# Altium PCB Center Console.PcbDoc
Units mm, origin at the board's own origin, x right, y up, seen from the top; angles counter-clockwise.
Board outline 60 x 60 mm, 2 copper layers (Top Layer, Bottom Layer); 16 components, 26 nets, 102 pads, 32 vias.
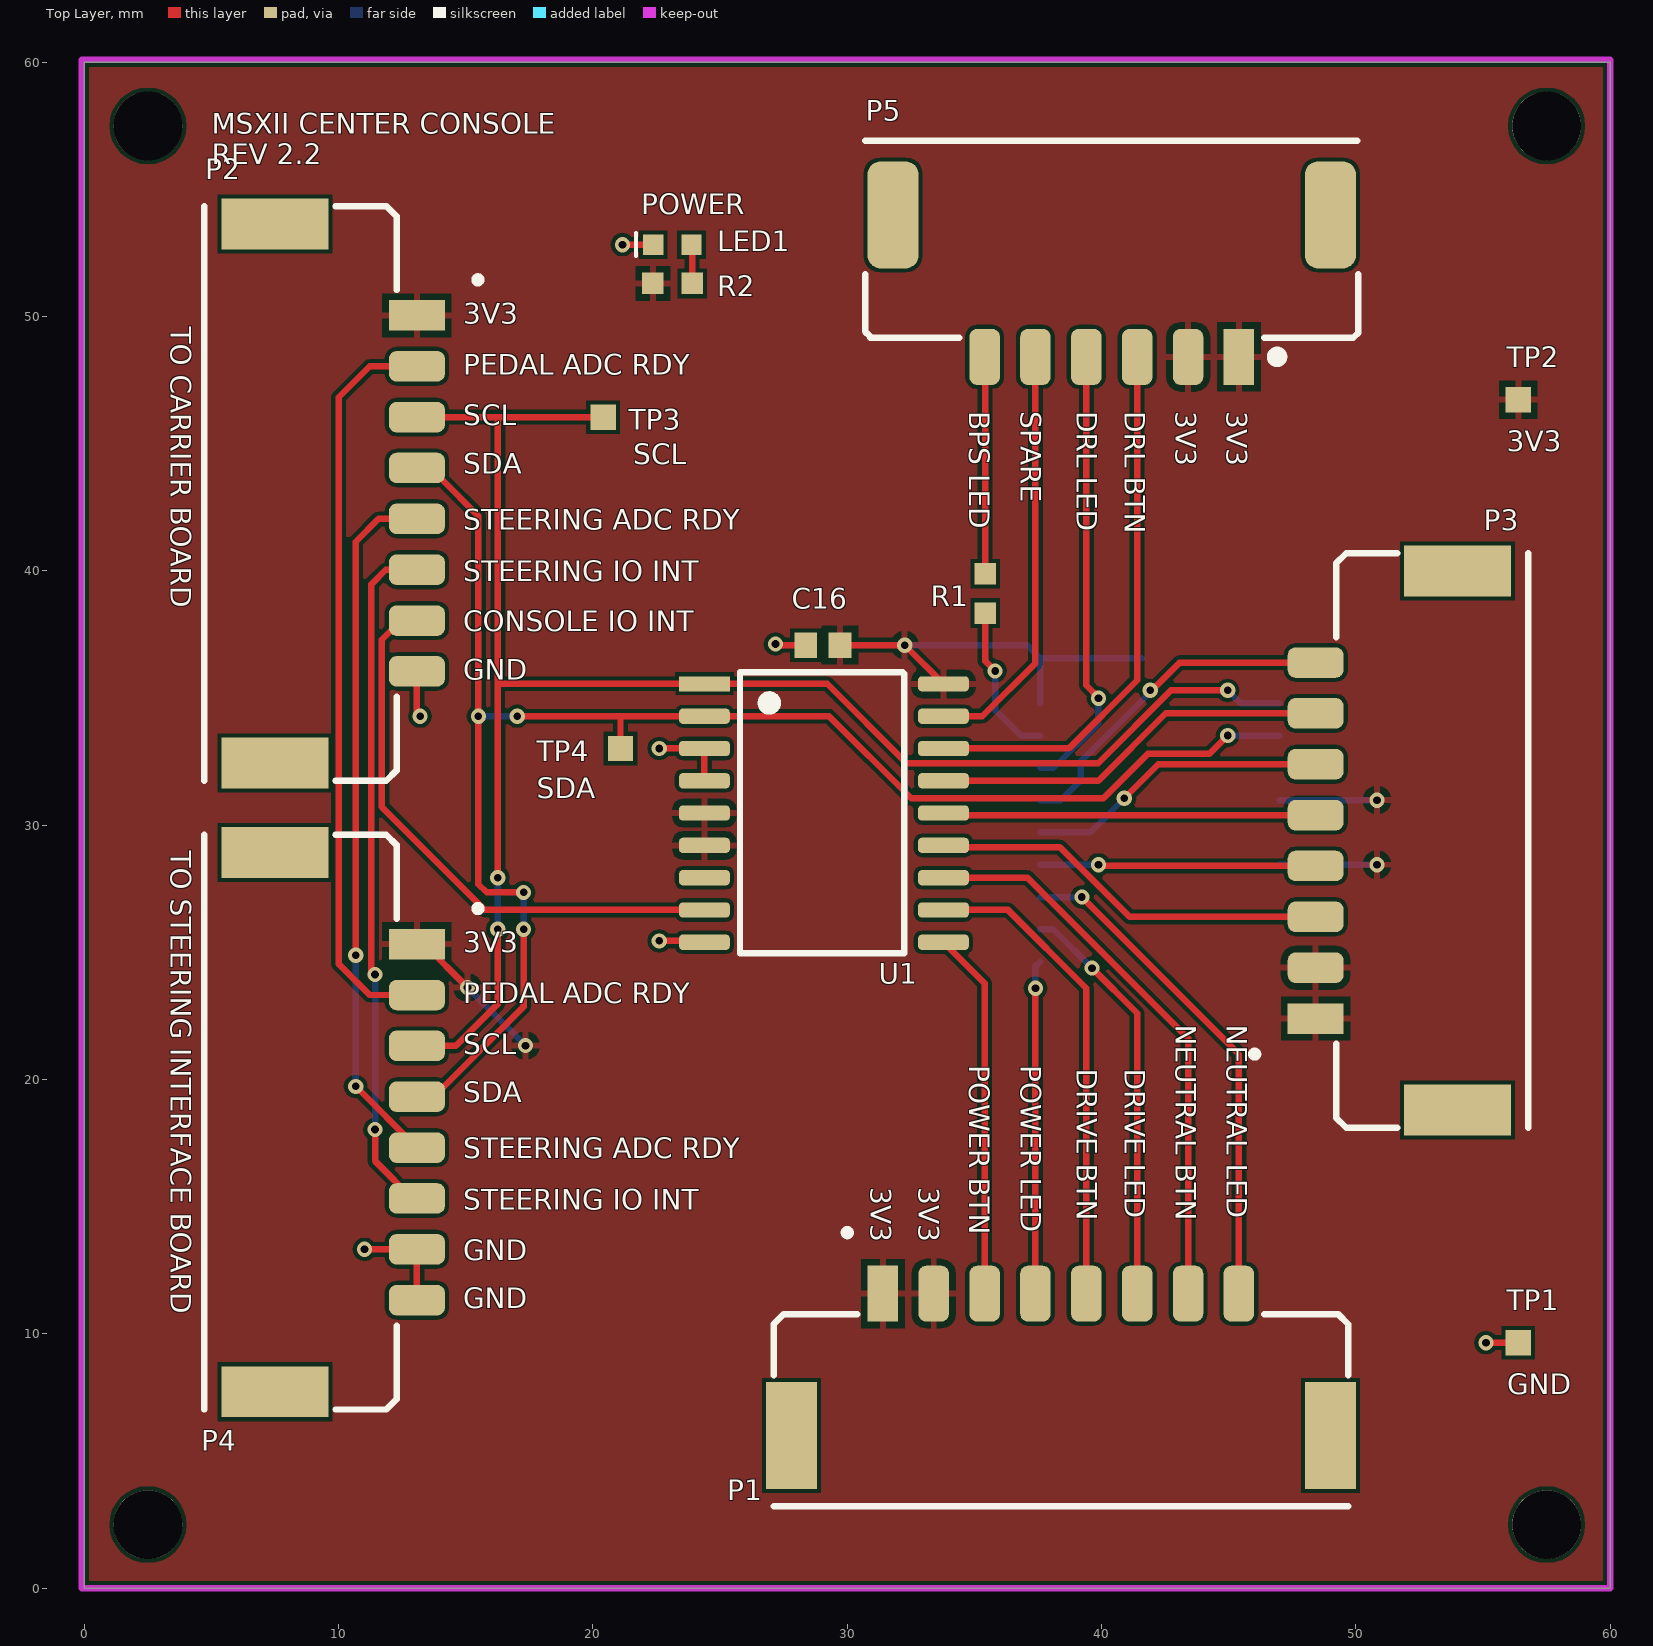
[diagram p0: Top Layer view]
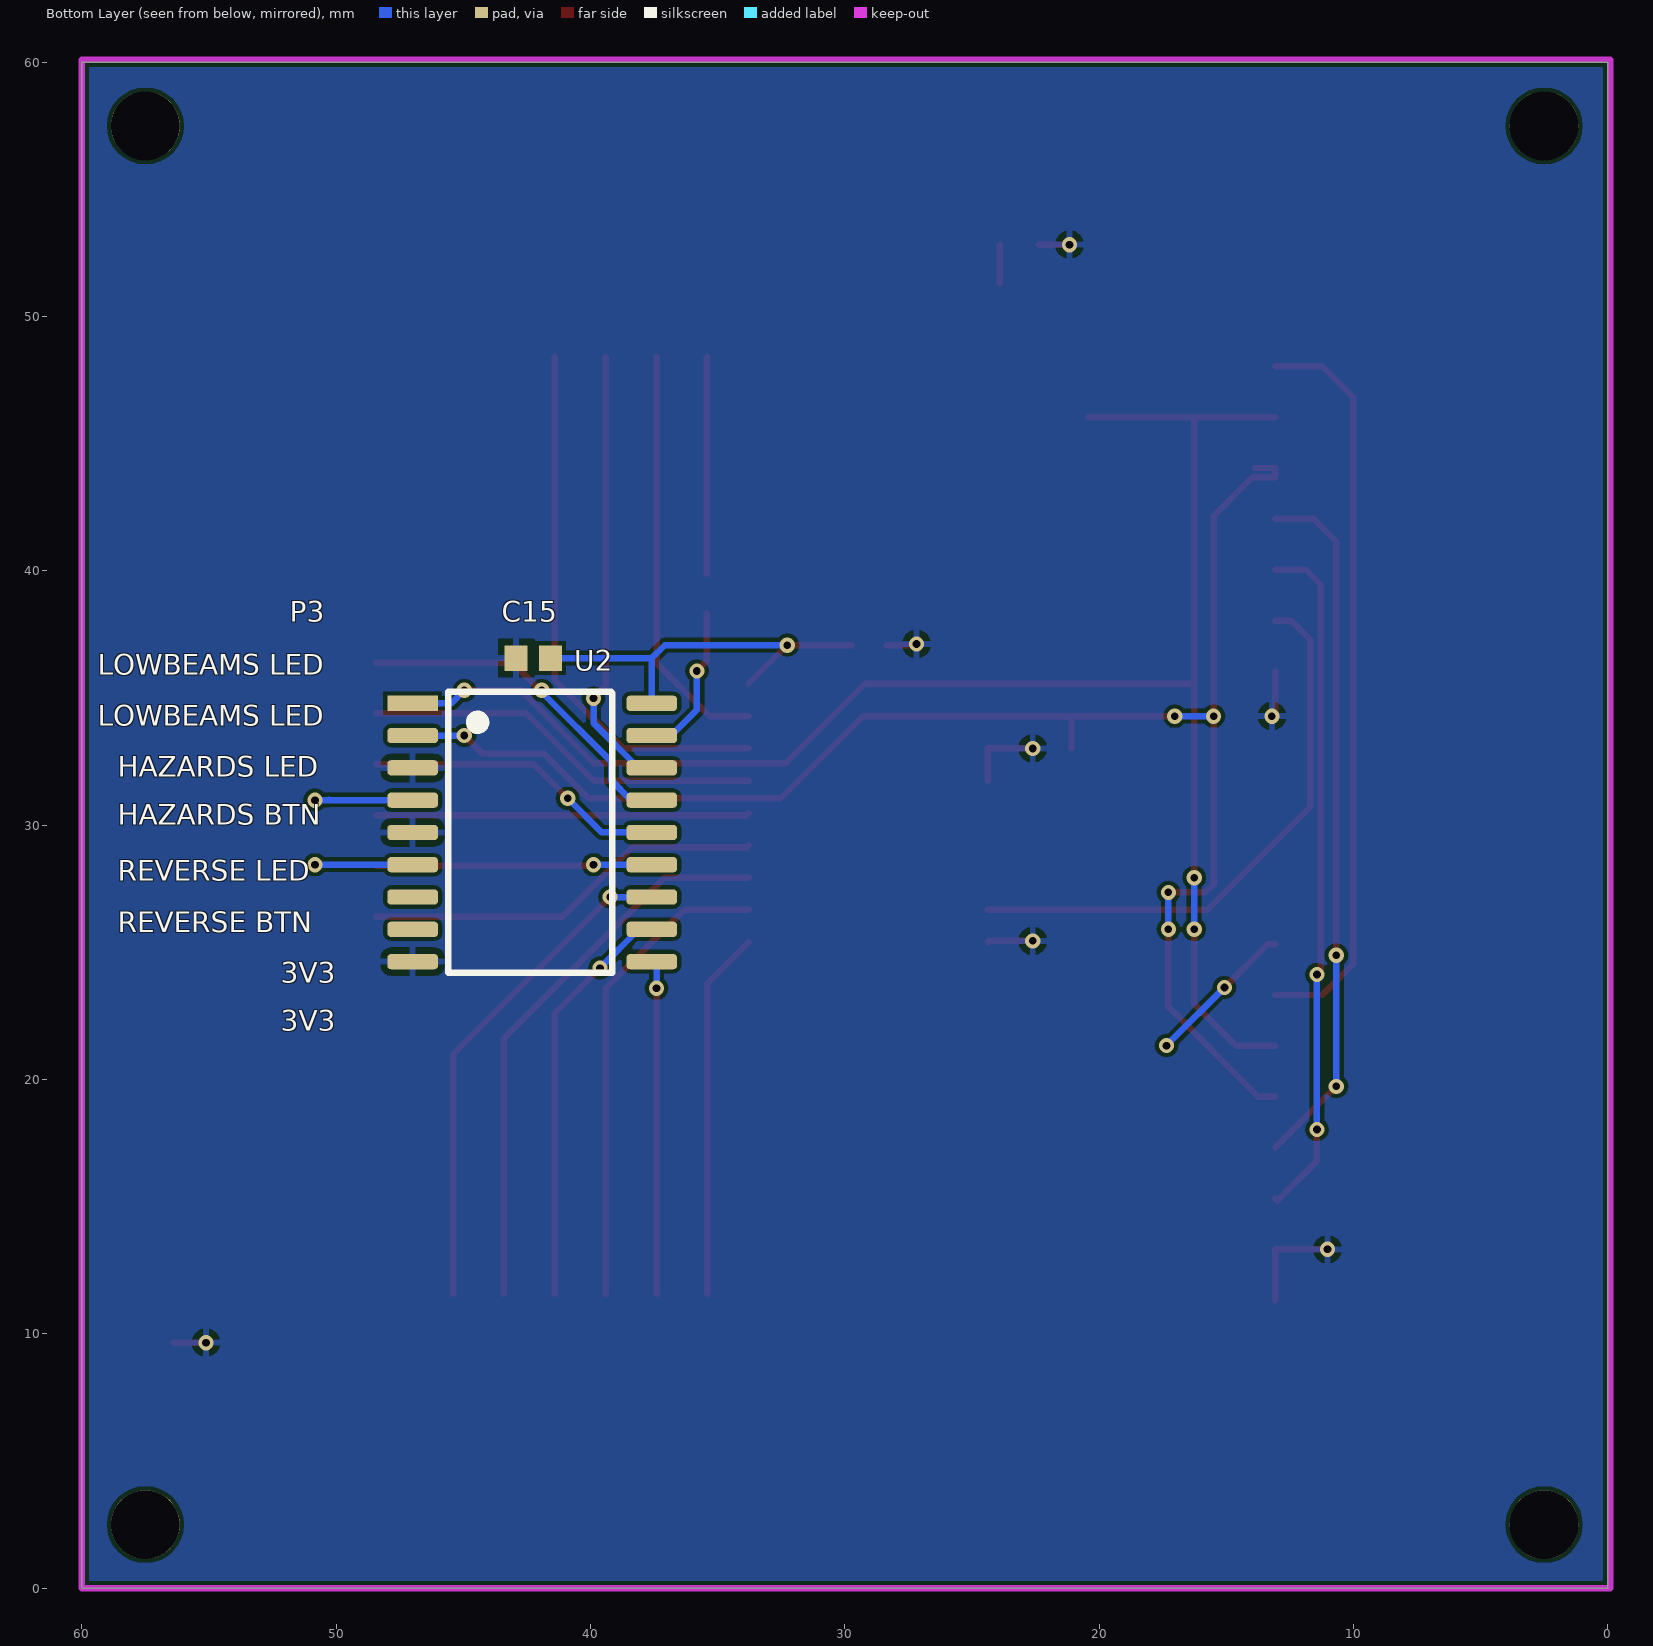
[diagram p1: Bottom Layer view, seen from below]
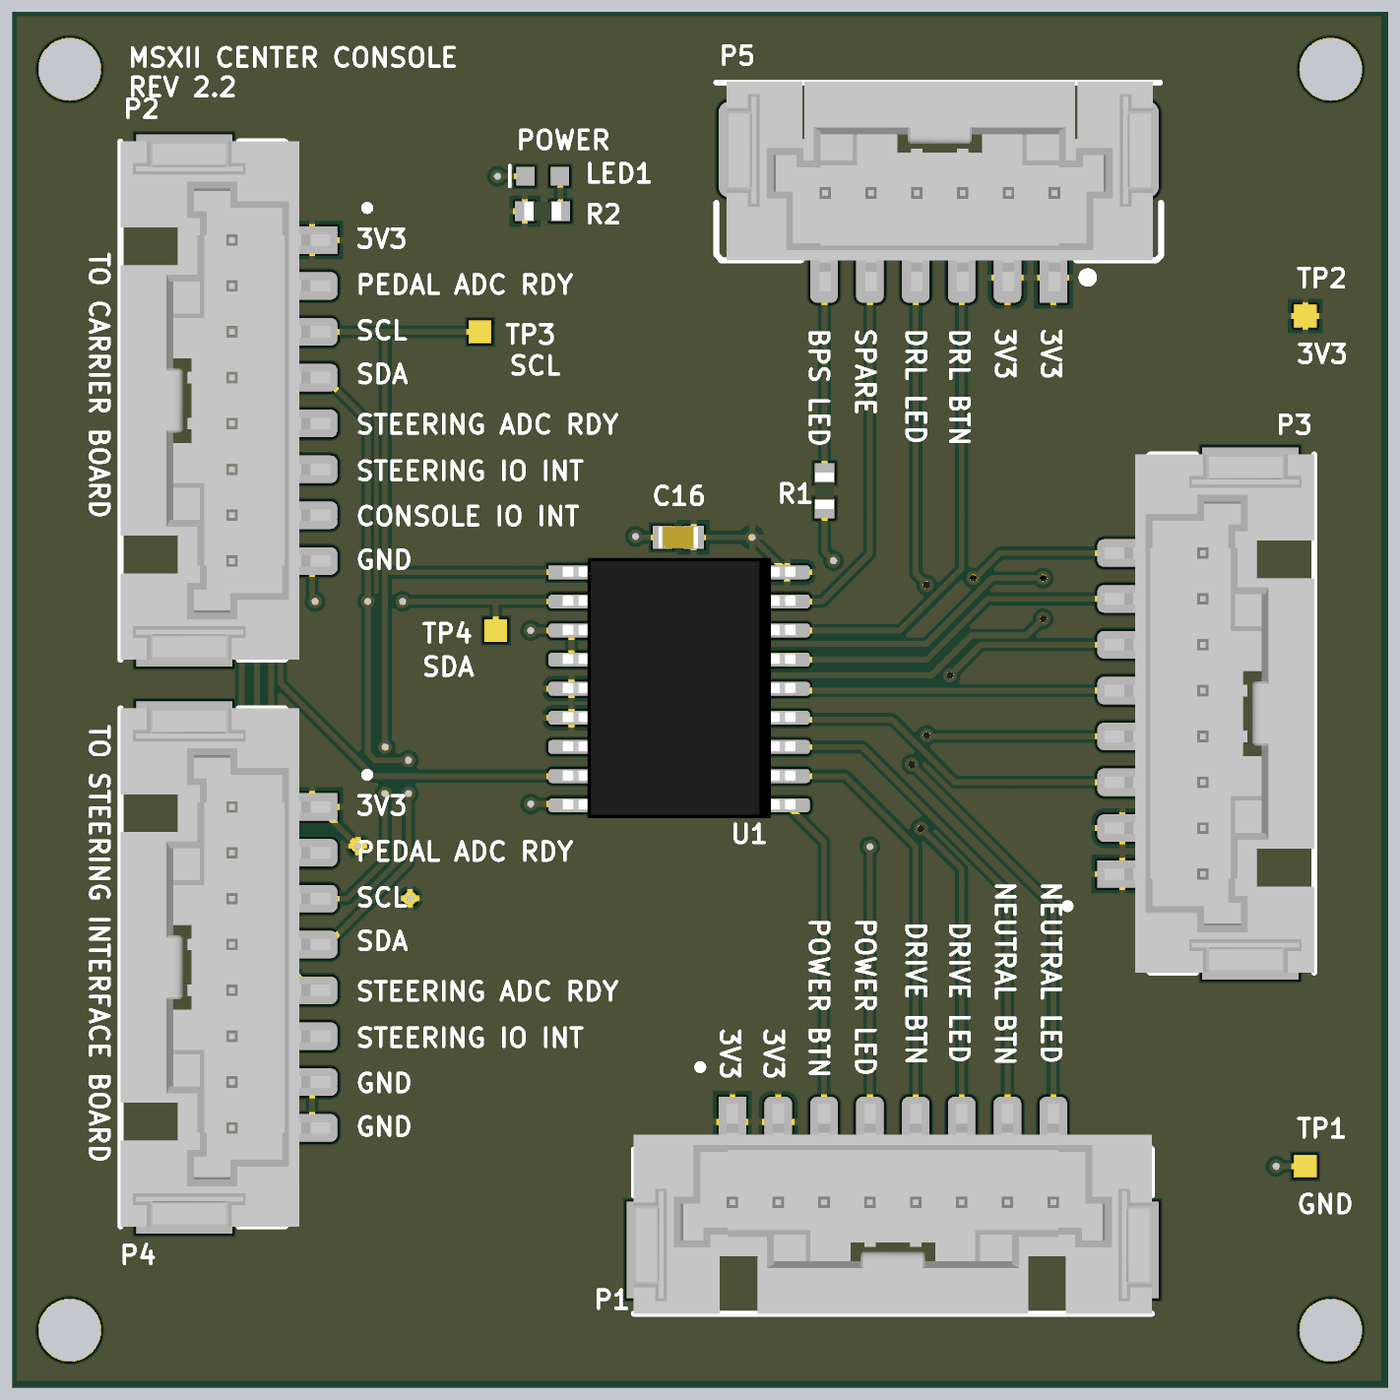
[diagram p2: 3D render of the assembled board from above, using the file's embedded part models]

## Layer stack, top to bottom
Top Solder: solder mask 0.0102, Solder Resist, Dk 3.5
Top Layer: signal copper 0.0356
Dielectric 1: dielectric 0.32, FR-4, Dk 4.8
Bottom Layer: signal copper 0.0356
Bottom Solder: solder mask 0.0102, Solder Resist, Dk 3.5

## Board outline
0,0 60,0 60,60 0,60

## Design rules (kind name [scope] priority, off if disabled: settings)
Clearance [All] p1: gap=0.152 ignorepadtopadclearanceinfootprint=TRUE
PolygonConnect [All] p1: connectstyle=Relief reliefconductorwidth=0.254 reliefentries=4 polygonreliefangle="90 Angle" airgapwidth=0.254
RoutingVias [All] p1: holewidth=0.3 width=0.6 viastyle="Through Hole" minholewidth=0.3 minwidth=0.6 maxholewidth=1 maxwidth=2
SolderMaskExpansion [All] p1: expansion=0.102
Width [All] p1: maxlimit=0.635 minlimit=0.254 preferedwidth=0.254
30 further rules are at their usual default settings.

## Components (designator, comment, footprint, x,y, rotation, side; value= is the part's Value field where it differs from the comment)
C15 "CAP CER 0.1UF 50V 10% X7R 0603" "CAP, 0603" 42.251,36.576 r0 bottom
C16 "CAP CER 0.1UF 50V 10% X7R 0603" "CAP, 0603" 29.043,37.084 r180 top
LED1 "LED GREEN CLEAR 2V 0603" LED_0603 23.826,52.842 r180 top
P1 "CONN 8POS DURA-CLIK 0.079\"" "CONN, 8POS Dura-Clik" 31.4,11.58 r0 top
P2 "CONN 8POS DURA-CLIK 0.079\"" "CONN, 8POS Dura-Clik" 13.075,50.05 r270 top
P3 "CONN 8POS DURA-CLIK 0.079\"" "CONN, 8POS Dura-Clik" 48.42,22.4 r90 top
P4 "CONN 8POS DURA-CLIK 0.079\"" "CONN, 8POS Dura-Clik" 13.075,25.325 r270 top
P5 "DURA-CLIK" "CONN, 6POS DURA-CLIK VERT" 45.4,48.42 r180 top
R1 "RES 510 OHM 5% 1/10W 0603" "RES, 0603" 35.423,39.116 r270 top
R2 "RES 10K OHM 1% 1/10W 0603" "RES, 0603" 23.127,51.308 r0 top
TP1 "Test Point" "Test Point" 56.388,9.652 r90 top
TP2 "Test Point" "Test Point" 56.388,46.736 r90 top
TP3 "Test Point" "Test Point" 20.396,46.05 r90 top
TP4 "Test Point" "Test Point" 21.082,33.02 r90 top
U1 "MCP23008" "IC 18SOIC" 24.382,35.56 r270 top locked
U2 "MCP23008" "IC 18SOIC" 46.99,34.798 r270 bottom locked

## Footprints (in the part's own frame and the unit in brackets; to place one, negate y for a bottom-side part, rotate by r counter-clockwise, add the part's x,y. Pads: shape width x height; smd on the part's side, far side on the other; paste and mask are expansions set on the pad)
"CAP, 0603" [mm] "Chip Capacitor, 2-Leads, Body 1.60x0.81mm, IPC Medium Density"
  rect 0.9x1 smd mask+0.076: 1(-0.675,0) 2(0.675,0)
  body extent -0.87,-0.48 0.88,0.48, height 0.9
"CONN, 6POS DURA-CLIK VERT" [mm]
  rect 1.2x2.2 smd: 1(0,0)
  rrect50% 1.2x2.2 smd: 2(2,0) 3(4,0) 4(6,0) 5(8,0) 6(10,0)
  rrect50% 2x4.2 smd: 7(-3.6,-5.58) 7(13.6,-5.58)
  silkscreen extent -4.7,-8.5 14.7,0.15, body extent -4.35,-8.54 14.25,0.61, height 7.97
"CONN, 8POS Dura-Clik" [mm] "WM10868CT-ND"
  rect 1.2x2.2 smd: 1(0,0)
  rrect50% 1.2x2.2 smd: 2(2,0) 3(4,0) 4(6,0) 5(8,0) 6(10,0) 7(12,0) 8(14,0)
  rect 2x4.2 smd: ""(-3.6,-5.58) ""(17.6,-5.58)
  silkscreen extent -4.3,-8.36 18.3,2.53, body extent -4.3,-8.36 18.3,0.79, height 8.02
"IC 18SOIC" [mm]
  rect 0.6x2 smd: 1(0,0)
  rrect50% 0.6x2 smd: 2(1.27,0) 3(2.54,0) 4(3.81,0) 5(5.08,0) 6(6.35,0) 7(7.62,0) 8(8.89,0) 9(10.16,0) 10(10.16,9.4) 11(8.89,9.4) 12(7.62,9.4) 13(6.35,9.4) 14(5.08,9.4) 15(3.81,9.4) 16(2.54,9.4) 17(1.27,9.4) 18(0,9.4)
  silkscreen extent -0.45,1.4 10.6,7.85, body extent -0.63,-0.38 10.73,9.78, height 2
LED_0603 [mm]
  rect 0.8x0.8 smd: 1(-0.05,0.01) 2(1.45,0.01)
  silkscreen extent 2.13,-0.46 2.13,0.45, body extent -0.09,-0.39 1.51,0.41, height 0.8
"RES, 0603" [mm] "Chip Resistor, 2-Leads, Body 1.60x0.80mm, IPC Medium Density"
  rect 0.85x0.85 smd: 1(-0.775,0) 2(0.775,0)
  body extent -0.8,-0.4 0.8,0.4, height 0.55
"Test Point" [mm]
  rect 1x1 smd paste-2: TP(0,0)

## Part data
C15 C16: "0.10µF ±10% 50V Ceramic Capacitor X7R 0603 (1608 Metric)", Capacitance=0.1µF, Manufacturer 1="AVX Corporation", Manufacturer Part Number 1=06035C104KAT2A, Operating Temperature="-55°C ~ 125°C", Package / Case="0603 (1608 Metric)", Ratings=-, Supplier Part Number 1=478-5052-1-ND, Temperature Coefficient=X7R, Tolerance=±10%, Voltage=50V, ComponentLink1Description=http://datasheets.avx.com/X7RDielectric.pdf, ComponentLink1URL=http://datasheets.avx.com/X7RDielectric.pdf, Height - Seated (Max)=-, Lead Spacing=-, Lead Style=-, Mounting Type="Surface Mount, MLCC", Packaging="Cut Tape (CT)", Part Status=Active, Size / Dimension="0.063\" L x 0.032\" W (1.60mm x 0.81mm)", Supplier 1=Digi-Key, Thickness (Max)="0.035\" (0.90mm)"
LED1: "Green 572nm LED Indication - Discrete 2V 0603 (1608 Metric)", Color=Green, Current - Test=20mA, Lens Color=Colorless, Manufacturer="Wurth Electronics Inc.", Manufacturer Part Number=150060VS75000, Millicandela Rating=40mcd, Package / Case="0603 (1608 Metric)", Supplier Device Package=0603, Supplier Part Number 1=732-4980-1-ND, Voltage - Forward (Vf) (Typ)=2V, Category=Optoelectronics, ComponentLink1Description=http://katalog.we-online.de/led/datasheet/150060VS75000.pdf, ComponentLink1URL=http://katalog.we-online.de/led/datasheet/150060VS75000.pdf, Features=-, Height (Max)=0.80mm, Lens Style/Size="Rectangle with Flat Top, 1.10mm x 0.70mm", Lens Transparency=Clear, Mounting Type="Surface Mount", Packaging="Cut Tape (CT)", Part Status=Active, Pricing 1="1=0.21, 100=0.1617, 500=0.13964 (CAD)", RoHS="RoHS Compliant", Size / Dimension="1.60mm L x 0.80mm W", Stock 1=9408, Supplier 1=Digi-Key, Viewing Angle=140°, Wavelength - Dominant=570nm, Wavelength - Peak=572nm
P1 P2 P3 P4: "8 Positions Header Connector 0.079\" (2.00mm) Surface Mount Tin", Current Rating=-, Insulation Color=Natural, Manufacturer 1="Molex, LLC", Manufacturer Part Number 1=5600200820, Supplier Part Number 1=WM10868CT-ND, ComponentLink1Description=http://www.molex.com/pdm_docs/sd/5600200820_sd.pdf, ComponentLink1URL=http://www.molex.com/pdm_docs/sd/5600200820_sd.pdf, Connector Type=Header, Contact Finish - Mating=Tin, Contact Finish - Post=Tin, Contact Finish Thickness - Mating=-, Contact Finish Thickness - Post=-, Contact Length - Mating=-, Contact Length - Post=-, Contact Material="Copper Alloy", Contact Shape=Square, Contact Type="Male Pin", Fastening Type="Latch Lock", Ingress Protection=-, Insulation Height="0.315\" (8.00mm)", Insulation Material="Polyamide (PA), Nylon", Mated Stacking Heights=9.3mm, Material Flammability Rating=-, Mounting Type="Surface Mount", Number of Positions=8, Number of Positions Loaded=All, Number of Rows=1, Operating Temperature=-, Overall Contact Length=-, Packaging="Cut Tape (CT)", Part Status=Active, Pitch - Mating="0.079\" (2.00mm)", Row Spacing - Mating=-, Series=DuraClik, Shrouding="Shrouded - 4 Wall", Style="Board to Cable/Wire", Supplier 1=Digi-Key, Termination=Solder, Voltage=-
P5: library part "CONN 6POS DURA-CLIK 0.079\"", "6 Positions Header, Shrouded Connector 0.079\" (2.00mm) Surface Mount, Vertical Tin", Current Rating=-, Insulation Color=Natural, Manufacturer=Molex, Manufacturer Part Number=5600200820, Supplier Part Number 1=WM10866CT-ND, Applications="Automotive, Industrial", Category="Connectors, Interconnects", ComponentLink1Description=http://www.molex.com/pdm_docs/sd/5600200220_sd.pdf, ComponentLink1URL=http://www.molex.com/pdm_docs/sd/5600200220_sd.pdf, Connector Type=Header, Contact Finish - Mating=Tin, Contact Finish - Post=Tin, Contact Finish Thickness - Mating=-, Contact Finish Thickness - Post=-, Contact Length - Mating=-, Contact Length - Post=-, Contact Material="Copper Alloy", Contact Shape=Square, Contact Type="Male Pin", Fastening Type="Latch Lock", Features="Solder Retention", Ingress Protection=-, Insulation Height="0.315\" (8.00mm)", Insulation Material="Polyamide (PA), Nylon", Mated Stacking Heights=9.3mm, Material Flammability Rating=-, Mounting Type="Surface Mount", Number of Positions=6, Number of Positions Loaded=All, Number of Rows=1, Operating Temperature=-, Overall Contact Length=-, Packaging="Cut Tape (CT)", Part Status=Active, Pitch - Mating="0.079\" (2.00mm)", Pricing 1="1=1.76, 10=1.542, 25=1.4512, 50=1.391, 100=1.3305, 250=1.20956 (CAD)", RoHS="RoHS Compliant", Row Spacing - Mating=-, Shrouding="Shrouded - 4 Wall", Stock 1=3826, Style="Board to Cable/Wire", Supplier 1=Digi-Key, Termination=Solder, Voltage Rating=-
R1: "RES SMD 510 OHM 5% 1/10W 0603", Manufacturer 1=Yageo, Manufacturer Part Number 1=RC0603JR-07510RL, Operating Temperature="-55°C ~ 155°C", Package / Case="0603 (1608 Metric)", Power=1/10W, Resistance=510, Supplier Device Package=0603, Supplier Part Number 1=311-510GRCT-ND, Temperature Coefficient=±100ppm/°C, Tolerance=±5%, ComponentLink1Description=http://www.yageo.com/documents/recent/PYu-RC_Group_51_RoHS_L_7.pdf, ComponentLink1URL=http://www.yageo.com/documents/recent/PYu-RC_Group_51_RoHS_L_7.pdf, Composition="Thick Film", Failure Rate=-, Height - Seated (Max)="0.022\" (0.55mm)", Packaging="Cut Tape (CT)", Part Status=Active, Size / Dimension="0.063\" L x 0.031\" W (1.60mm x 0.80mm)", Supplier 1=Digi-Key
R2: "RES SMD 10K OHM 1% 1/10W 0603", Manufacturer 1=Yageo, Manufacturer Part Number 1=RC0603FR-0710KL, Operating Temperature="-55°C ~ 155°C", Package / Case="0603 (1608 Metric)", Power=1/10W, Resistance=10k, Supplier Device Package=0603, Supplier Part Number 1=311-10.0KHRCT-ND, Temperature Coefficient=±100ppm/°C, Tolerance=±1%, ComponentLink1Description=http://www.yageo.com/documents/recent/PYu-RC_Group_51_RoHS_L_7.pdf, ComponentLink1URL=http://www.yageo.com/documents/recent/PYu-RC_Group_51_RoHS_L_7.pdf, Composition="Thick Film", Failure Rate=-, Height - Seated (Max)="0.022\" (0.55mm)", Packaging="Cut Tape (CT)", Part Status=Active, Size / Dimension="0.063\" L x 0.031\" W (1.60mm x 0.80mm)", Supplier 1=Digi-Key
U1 U2: library part "IC I/O EXPANDER I2C 8B 18SOIC", "MCP23008 I/O Expander 8B+1Int 18P SOIC", Current - Output Source/Sink=25mA, Manufacturer="Microchip Technology", Manufacturer Part Number=MCP23008T-E/SO, Operating Temperature="-40°C ~ 125°C", Package / Case="18-SOIC (0.295\", 7.50mm Width)", Supplier Device Package=18-SOIC, Supplier Part Number 1=MCP23008T-E/SOCT-ND, Voltage - Supply="1.8 V ~ 5.5 V", Category="Integrated Circuits (ICs)", ComponentLink1Description=http://www.microchip.com/mymicrochip/filehandler.aspx?ddocname=en021920, ComponentLink1URL=http://www.microchip.com/mymicrochip/filehandler.aspx?ddocname=en021920, Features=POR, Interface=I²C, Interrupt Output=Yes, Mounting Type="Surface Mount", Number of I/O=8, Output Type=Push-Pull, Packaging="Cut Tape (CT)", Part Status=Active, Pricing 1="1=1.62, 25=1.3548, 100=1.2431 (CAD)", RoHS="RoHS Compliant", Stock 1=5607, Supplier 1=Digi-Key

## Free pads (board coordinates)
  round 2.7 hole 2.7: ""(2.5,2.5) ""(2.5,57.5) ""(57.5,2.5) ""(57.5,57.5)

## Via types
v1: diameter 0.6, hole 0.3, Top Layer to Bottom Layer, tented both sides, 30 vias
v2: diameter 0.6, hole 0.3, Top Layer to Bottom Layer, 2 vias

## Nets (pads, with @x,y where several pads share a name; then routed paths per layer and width w, separated by ;. In a path a pad name is that pad's centre, name@x,y a point inside that pad or via, vN(x,y) a via of type N, cw(c..) or ccw(c..) an arc to the next point about the centre after c; other vN are vias at no path point)
3V3: C15.1 C16.1 P1.1 P1.2 P2.1 P3.1 P3.2 P4.1 P5.1 P5.2 R2.1 TP2.TP U1.5 U1.6 U1.18 U2.4 U2.6 U2.18 | length 29.7
  Top Layer w0.254: P4.1 13.365,25.325 v2(15.068,23.622) ; C16.1 v1(32.258,37.084) U1.18
  Bottom Layer w0.254: v2(15.068,23.622) 17.195,21.495 17.195,21.336 v2(17.344,21.336) ; v1(32.258,37.084) 37.082,37.084 37.59,36.576 ; U2.18 37.59,36.576 ; C15.1 37.59,36.576 ; U2.6 v1(50.832,28.448) ; U2.4 50.269,30.988 50.292,31.011 50.315,30.988 v1(50.832,30.988)
CONSOLE_IO_INTERRUPT: P2.7 U1.8 | length 22.6
  Top Layer w0.254: P2.7 12.446,38.05 11.696,37.3 11.696,30.722 15.748,26.67 U1.8
GND: C15.2 C16.2 LED1.2 P2.8 P4.7 P4.8 TP1.TP U1.3 U1.4 U1.9 U2.3 U2.5 U2.9 | length 14.4
  Top Layer w0.254: v1(11.018,13.325) P4.7 P4.8 ; P2.8 13.075,34.417 v1(13.202,34.29) ; v1(21.159,52.832) LED1.2 ; v1(22.606,25.452) 24.33,25.452 U1.9 ; v1(22.606,33.02) U1.3 U1.4 ; v1(27.178,37.126) 27.22,37.084 C16.2 ; v1(55.118,9.652) TP1.TP
GP0/POWER_BTN: P1.3 U1.10 | length 14.5
  Top Layer w0.254: U1.10 35.4,23.782 P1.3
GP0/POWER_LED: P1.4 U2.10 | length 13.1
  Top Layer w0.254: P1.4 v1(37.4,23.592)
  Bottom Layer w0.254: v1(37.4,23.592) 37.4,24.448 U2.10
GP1/DRIVE_BTN: P1.5 U1.11 | length 18.9
  Top Layer w0.254: U1.11 36.322,26.67 39.4,23.592 P1.5
GP1/DRIVE_LED: P1.6 U2.11 | length 16.2
  Top Layer w0.254: v1(39.624,24.384) 41.4,22.608 P1.6
  Bottom Layer w0.254: U2.11 38.1,25.908 v1(39.624,24.384)
GP2/NEUTRAL_BTN: P1.7 U1.12 | length 22.3
  Top Layer w0.254: U1.12 37.084,27.94 43.4,21.624 P1.7
GP2/NEUTRAL_LED: P1.8 U2.12 | length 19.8
  Top Layer w0.254: v1(39.226,27.178) 45.4,21.004 P1.8
  Bottom Layer w0.254: U2.12 v1(39.226,27.178)
GP3/REVERSE_BTN: P3.3 U1.13 | length 15.8
  Top Layer w0.254: U1.13 33.853,29.139 38.363,29.139 41.102,26.4 P3.3
GP3/REVERSE_LED: P3.4 U2.13 | length 10.8
  Top Layer w0.254: v1(39.878,28.448) 39.926,28.4 P3.4
  Bottom Layer w0.254: U2.13 v1(39.878,28.448)
GP4/HAZARDS_BTN: P3.5 U1.14 | length 14.7
  Top Layer w0.254: U1.14 33.862,30.4 P3.5
GP4/HAZARDS_LED: P3.6 U2.14 | length 11.9
  Top Layer w0.254: v1(40.894,31.059) 42.235,32.4 P3.6
  Bottom Layer w0.254: U2.14 39.553,29.718 v1(40.894,31.059)
GP5/LOWBEAMS_BTN: P3.7 U1.15 | length 15.7
  Top Layer w0.254: U1.15 39.878,31.75 42.528,34.4 P3.7
GP5/LOWBEAMS_LED: P3.8 U2.15 | length 13.5
  Top Layer w0.254: v1(41.91,35.306) 41.981,35.306 43.075,36.4 P3.8
  Bottom Layer w0.254: U2.15 38.402,30.988 39.175,31.761 39.175,32.499 41.91,35.235 v1(41.91,35.306)
GP6/DRL_BTN: P5.3 U1.16 | length 21.4
  Top Layer w0.254: U1.16 38.717,33.02 41.4,35.703 P5.3
GP6/DRL_LED: P5.4 U2.16 | length 17.6
  Top Layer w0.254: P5.4 39.4,35.501 v1@39.878,35.023
  Bottom Layer w0.254: U2.16 38.114,32.258 39.878,34.022 v1(39.878,35)
GP7/BPS_FAULT_LED: R1.2 U2.17 | length 6.2
  Top Layer w0.254: R1.2 35.423,36.459 v1(35.814,36.068)
  Bottom Layer w0.254: v1(35.814,36.068) 35.814,34.533 36.819,33.528 U2.17
GP7/SPARE_IN: P5.5 U1.17 | length 16.5
  Top Layer w0.254: U1.17 35.313,34.29 37.4,36.377 P5.5
I2C_SCL: P2.3 P4.3 TP3.TP U1.1 U2.1 | length 67.7
  Top Layer w0.254: P4.3 14.612,21.325 16.256,22.969 v1(16.256,25.908) ; P2.3 16.256,46.05 ; v1(16.256,27.94) 16.256,35.56 ; TP3.TP 16.256,46.05 ; v1(44.958,35.306) 42.729,35.306 39.864,32.441 32.329,32.441 29.21,35.56 U1.1 16.256,35.56 ; 16.256,35.56 16.256,46.05
  Bottom Layer w0.254: v1(16.256,25.908) v1(16.256,27.94) ; v1(44.958,35.306) 45.466,34.798 U2.1
I2C_SDA: P2.4 P4.4 TP4.TP U1.2 U2.2 | length 65.9
  Top Layer w0.254: P4.4 13.737,19.325 17.272,22.86 v1(17.272,25.908) ; P2.4@13.862,44.05 P2.4 13.075,43.688 13.97,43.688 15.494,42.164 v1(15.494,34.29) 15.494,27.686 15.819,27.361 v1(17.272,27.361) ; v1(17.018,34.29) 21.082,34.29 ; TP4.TP 21.082,34.29 ; v1(44.958,33.528) 44.236,32.806 41.822,32.806 40.075,31.059 32.512,31.059 29.281,34.29 U1.2 21.082,34.29
  Bottom Layer w0.254: v1(15.494,34.29) v1(17.018,34.29) ; v1(17.272,25.908) v1(17.272,27.361) ; v1(44.958,33.528) U2.2
NetLED1_1: LED1.1 R2.2 | length 1.5
  Top Layer w0.254: LED1.1 23.902,52.806 R2.2
NetP5_6: P5.6 R1.1 | length 8.5
  Top Layer w0.254: P5.6 35.423,48.397 R1.1
PEDAL_ADC_READY: P2.2 P4.2 | length 29.4
  Top Layer w0.254: P4.2 11.219,23.325 10,24.544 10,46.83 11.22,48.05 P2.2
STEERING_ADC_READY: P2.5 P4.5 | length 27.6
  Top Layer w0.254: v1(10.668,19.732) P4.5 ; v1(10.668,24.892) 10.668,41.148 11.57,42.05 P2.5
  Bottom Layer w0.254: v1(10.668,19.732) v1(10.668,24.892)
STEERING_IO_INTERRUPT: P2.6 P4.6 | length 27.1
  Top Layer w0.254: v1(11.43,18.034) 11.43,16.8 12.99,15.24 P4.6 ; v1(11.43,24.13) 11.289,24.271 11.289,39.483 11.856,40.05 P2.6
  Bottom Layer w0.254: v1(11.43,18.034) v1(11.43,24.13)
pads on no net: P1. P2. P3. P4. P5.7 U1.7 U2.7 U2.8

## Polygon pours and split planes (outlines as drawn)
3V3 on Top Layer "Top Layer-3V3" (solid, pour order 16): 0,0 60,0 59.9,0.1 59.9,60.1 0.1,60.1 0,60
GND on Bottom Layer "Bottom Layer-GND" (solid, pour order 14): 0,0 60,0 60,60 59.9,60.1 0,60.1

## Keep-outs
Keep-Out Layer:
  lines w0.254: -0.1,60.1 -0.1,0 60,0 60,60 59.9,60.1 ; 0,60.1 60,60.1

## Silkscreen, mask and mechanical layers (free items; w line width, h text height)
Top Overlay:
  text "MSXII CENTER CONSOLE / REV 2.2" at 5,56 h0.8
  text "POWER" at 21.891,54.031 h0.8
  text "3V3" at 14.9,49.725 h0.8
  text "TO CARRIER BOARD" at 3.4,49.6 h0.8 r270
  text "PEDAL ADC RDY" at 14.9,47.725 h0.8
  text "BPS LED" at 34.792,46.285 h0.8 r270
  text "SPARE" at 36.817,46.285 h0.8 r270
  text "DRL LED" at 39.017,46.285 h0.8 r270
  text "DRL BTN" at 40.917,46.285 h0.8 r270
  text "3V3" at 42.917,46.285 h0.8 r270
  text "3V3" at 44.917,46.285 h0.8 r270
  text "SCL" at 14.9,45.725 h0.8
  text "3V3" at 55.926,44.704 h0.8
  text "SCL" at 21.59,44.196 h0.8
  text "SDA" at 14.9,43.825 h0.8
  text "STEERING ADC RDY" at 14.9,41.625 h0.8
  text "STEERING IO INT" at 14.9,39.6 h0.8
  text "CONSOLE IO INT" at 14.9,37.625 h0.8
  text "GND" at 14.9,35.725 h0.8
  text "SDA" at 17.78,31.059 h0.8
  text "TO STEERING INTERFACE BOARD" at 3.4,29 h0.8 r270
  text "3V3" at 14.9,25 h0.8
  text "PEDAL ADC RDY" at 14.9,23 h0.8
  text "NEUTRAL BTN" at 42.917,22.155 h0.8 r270
  text "NEUTRAL LED" at 44.917,22.155 h0.8 r270
  text "SCL" at 14.9,21 h0.8
  text "POWER BTN" at 34.792,20.556 h0.8 r270
  text "POWER LED" at 36.817,20.556 h0.8 r270
  text "DRIVE BTN" at 39.017,20.422 h0.8 r270
  text "DRIVE LED" at 40.917,20.422 h0.8 r270
  text "SDA" at 14.9,19.1 h0.8
  text "STEERING ADC RDY" at 14.9,16.9 h0.8
  text "3V3" at 30.917,15.757 h0.8 r270
  text "3V3" at 32.817,15.757 h0.8 r270
  text "STEERING IO INT" at 14.9,14.875 h0.8
  text "GND" at 14.9,12.9 h0.8
  text "GND" at 14.9,11 h0.8
  text "GND" at 55.944,7.62 h0.8
Bottom Overlay:
  text "P3" at 51.816,37.998 h0.8
  text "LOWBEAMS LED" at 59.381,35.917 h0.8
  text "LOWBEAMS LED" at 59.381,33.917 h0.8
  text "HAZARDS LED" at 58.581,31.917 h0.8
  text "HAZARDS BTN" at 58.581,30.017 h0.8
  text "REVERSE LED" at 58.581,27.817 h0.8
  text "REVERSE BTN" at 58.581,25.792 h0.8
  text "3V3" at 52.183,23.817 h0.8
  text "3V3" at 52.183,21.917 h0.8